# Altium PCB DQLA-Q.PcbDoc (part 1 of 2)
Units mil, origin at the board's own origin, x right, y up, seen from the top; angles counter-clockwise.
Board outline 12390.02 x 2400.02 mil, 6 copper layers (Top Layer, Plane 1, Signal 1, Signal 2, Plane 2, Bottom Layer), stack 32.112 mil thick; 112 components, 227 nets, 639 pads, 315 vias.
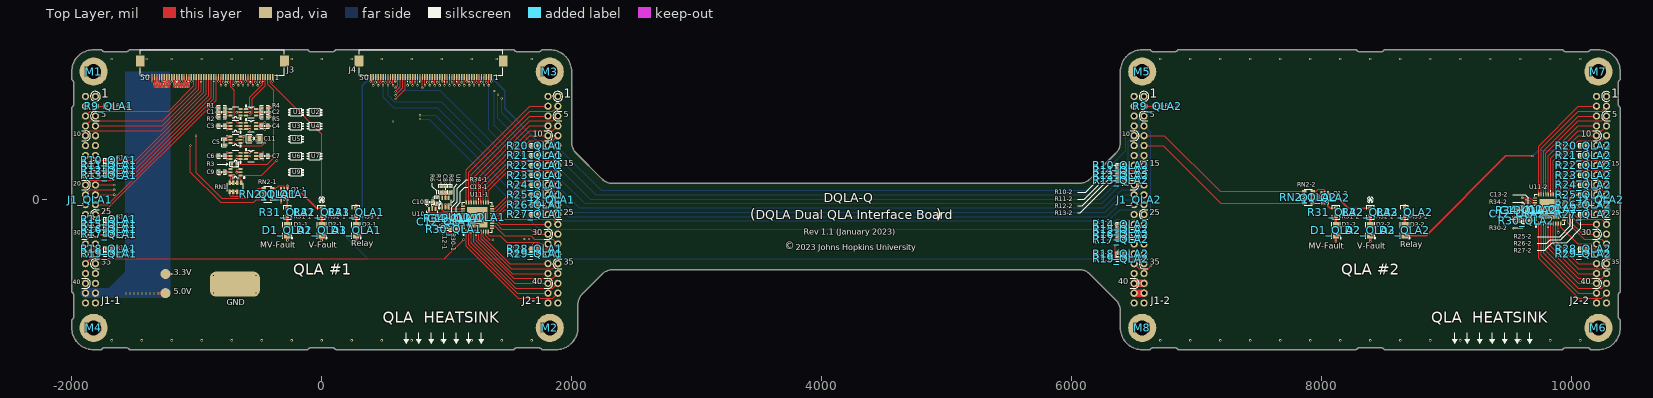
[diagram p0: Top Layer view]
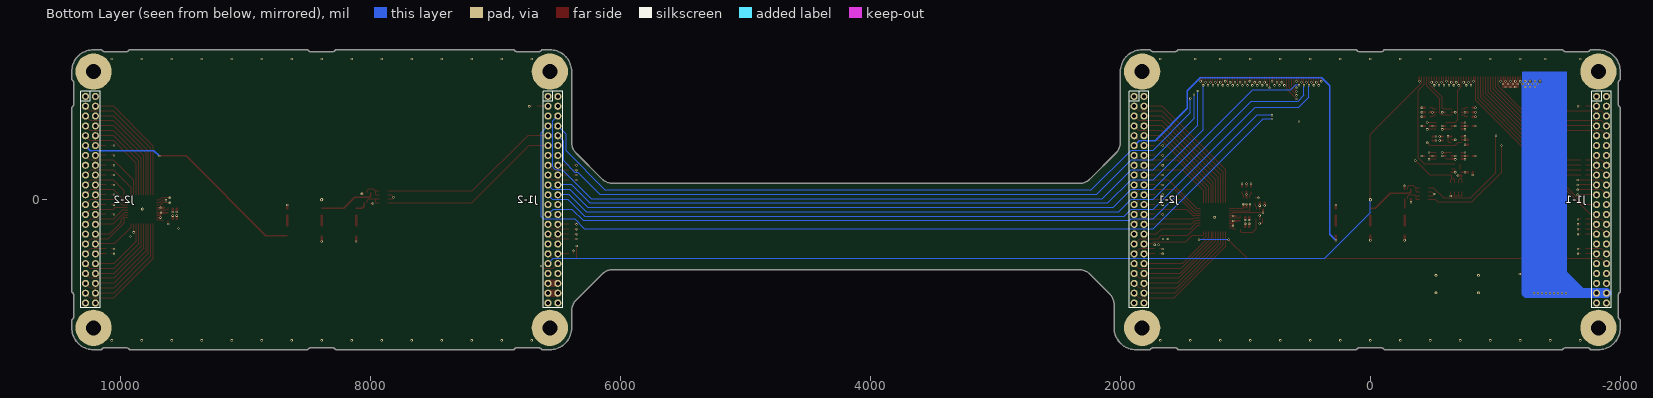
[diagram p1: Bottom Layer view, seen from below]
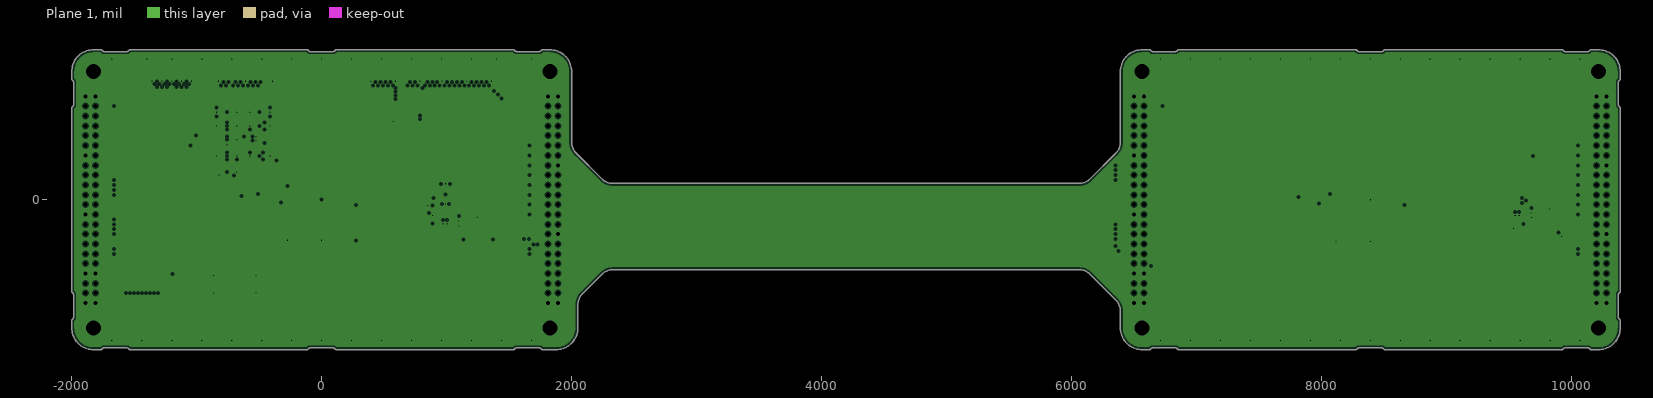
[diagram p2: Plane 1, clearances drawn from the general rule]
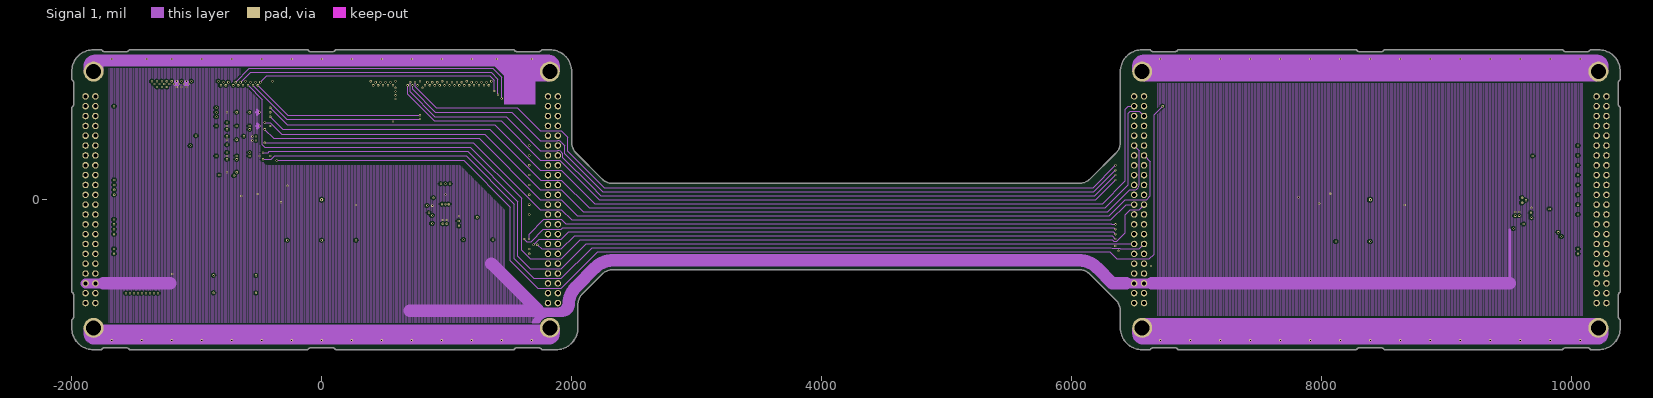
[diagram p3: Signal 1]
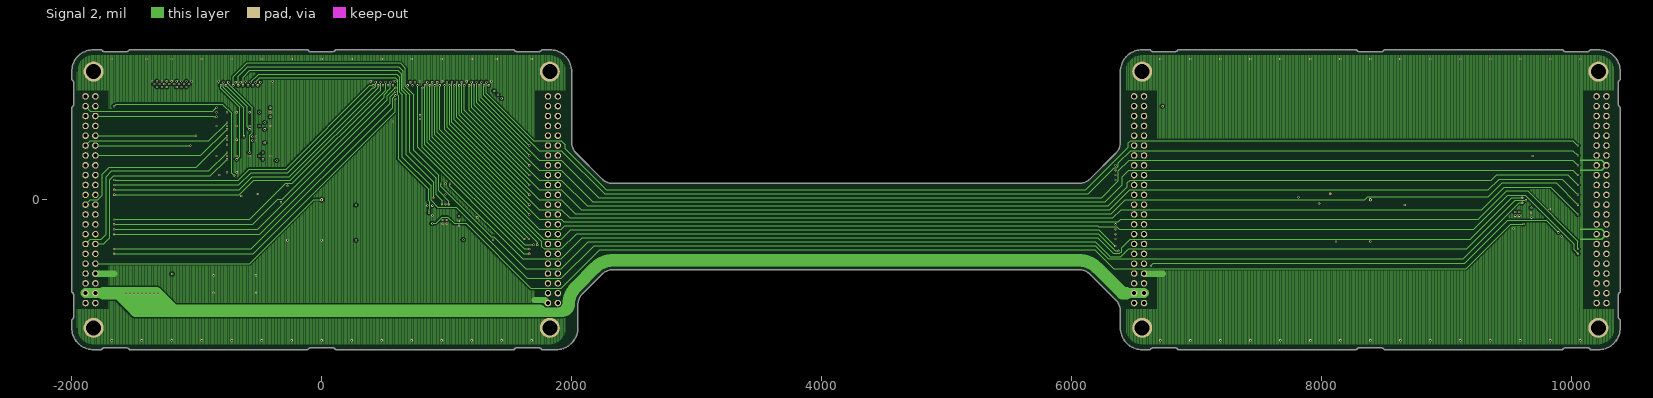
[diagram p4: Signal 2]
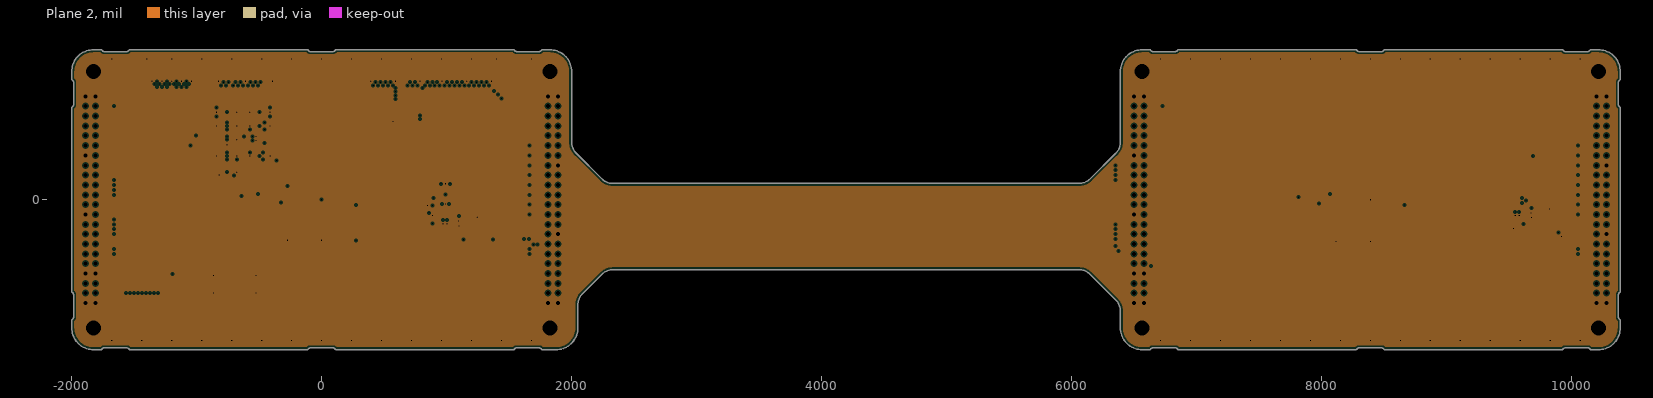
[diagram p5: Plane 2, clearances drawn from the general rule]
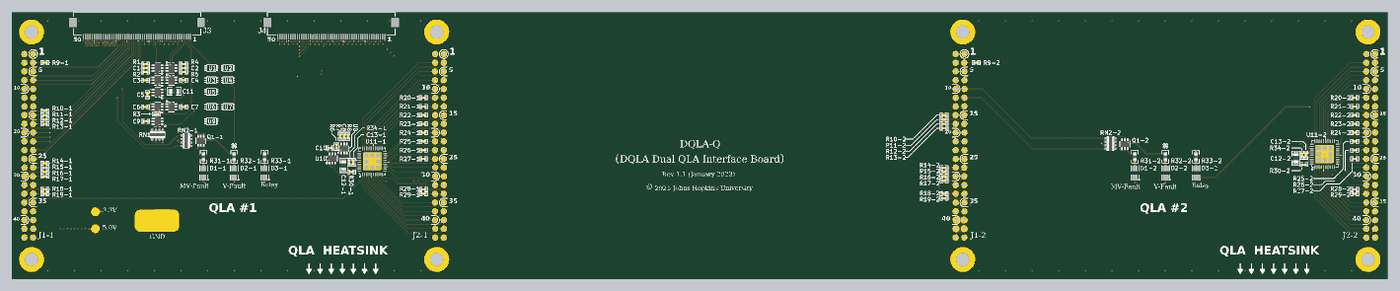
[diagram p7: 3D render of the assembled board from above, using the file's embedded part models]

## Layer stack, top to bottom
Top Solder: solder mask 0.4, Solder Resist, Dk 3.5
Top Layer: signal copper 1.4
Dielectric 2: prepreg 2.8, PP-006, Dk 4.1
Plane 1: plane copper 1.378, net GND
Dielectric 4: core 2.8, PP-006, Dk 4.1
Signal 1: signal copper 1.378
Dielectric 1: dielectric 12.6, FR-4, Dk 4.8
Signal 2: signal copper 1.378
Dielectric 5: core 2.8, PP-006, Dk 4.1
Plane 2: plane copper 1.378, net GND
Dielectric 3: prepreg 2.8, PP-006, Dk 4.1
Bottom Layer: signal copper 1.4
Bottom Solder: solder mask 0.4, Solder Resist, Dk 3.5

## Board outline
-1825,-1200 -1760.91,-1200 cw(c-1738,-1210) -1738,-1185 -1562,-1185 cw(c-1562,-1210) -1539.08,-1200 -1539.1,-1200.01 -110.92,-1200 cw(c-88.01,-1210) -88,-1185 88,-1185 cw(c88,-1210) 110.91,-1200 1539.08,-1199.99 cw(c1561.99,-1210) 1562,-1185 1738,-1185 cw(c1738,-1210) 1760.91,-1200 1875,-1200 ccw(c1875,-1025) 2050,-1025 2050,-840 cw(c2175,-840) 2086.61,-751.61 2241.61,-596.61 cw(c2330,-685) 2330,-560 6060,-560 cw(c6060,-685) 6148.39,-596.61 6353.39,-801.61 cw(c6265,-890) 6390,-890 6390,-1025 ccw(c6565,-1025) 6565,-1200 6629.09,-1200 cw(c6652,-1210) 6652,-1185 6828,-1185 cw(c6828,-1210) 6850.92,-1200 6850.9,-1200.01 8279.08,-1200 cw(c8301.99,-1210) 8302,-1185 8478,-1185 cw(c8478,-1210) 8500.91,-1200 9929.08,-1199.99 cw(c9951.99,-1210) 9952,-1185 10128,-1185 cw(c10128,-1210) 10150.91,-1200 10215,-1200 ccw(c10215,-1025) 10390,-1025 10390,-960.91 cw(c10400,-938) 10375,-938 10375,-762 cw(c10400,-762) 10390,-739.09 10390.01,739.09 10390,739.08 cw(c10400,761.99) 10375,761.99 10375,937.99 cw(c10400,937.99) 10390,960.91 10390,1024.99 ccw(c10215,1025) 10215,1200 10150.91,1200 cw(c10128,1210) 10128,1185 9952,1185 cw(c9952,1210) 9929.08,1200 8500.91,1200 cw(c8478,1210) 8478,1185 8302,1185 cw(c8302,1210) 8279.08,1200 6850.9,1200.01 6850.92,1200 cw(c6828,1210) 6828,1185 6652,1185 cw(c6652,1210) 6629.09,1200 6565,1200 ccw(c6565,1025) 6390,1025 6390,460 cw(c6265,460) 6353.39,371.61 6148.39,166.61 cw(c6060,255) 6060,130 2330,130 cw(c2330,255) 2241.61,166.61 2036.61,371.61 cw(c2125,460) 2000,460 2000,1025 ccw(c1825,1025) 1825,1200 1760.91,1200 cw(c1738,1210) 1738,1185 1562,1185 cw(c1562,1210) 1539.08,1200 110.91,1200 cw(c88,1210) 88,1185 -88,1185 cw(c-88,1210) -110.92,1200 -1539.1,1200.01 -1539.08,1200 cw(c-1562,1210) -1562,1185 -1738,1185 cw(c-1738,1210) -1760.91,1200 -1825,1200 ccw(c-1825,1025) -2000,1025 -2000,960.91 cw(c-2010,938) -1985,938 -1985,762 cw(c-2010,762) -2000,739.08 -2000.01,739.1 -2000,-739.08 cw(c-2010,-762) -1985,-762 -1985,-938 cw(c-2010,-938) -2000,-960.91 -2000,-1025 ccw(c-1825,-1025)

## Design rules (kind name [scope] priority, off if disabled: settings)
Clearance ClearancePoly [InPoly] p1: gap=9 ignorepadtopadclearanceinfootprint=FALSE
Clearance [All] p2: gap=6 ignorepadtopadclearanceinfootprint=FALSE
ComponentClearance [All] p1 off: gap=10 collisioncheckmode=3 verticalgap=10 showdistances=FALSE
HoleSize [All] p1: absolutevalues=TRUE maxlimit=250 minlimit=8 maxpercent=80.000 minpercent=20.000
MinimumSolderMaskSliver [All] p1: minsoldermaskwidth=4
PlaneClearance [All] p1: clearance=12
PlaneConnect PlaneConnectRelief [(AsMils(Hole)>20)And(AsMils(Hole)<60)] p1: planeconnectstyle=Relief reliefexpansion=20 reliefentries=4 reliefconductorwidth=10 reliefairgap=10
PlaneConnect [All] p2: planeconnectstyle=Direct reliefexpansion=20 reliefentries=4 reliefconductorwidth=10 reliefairgap=10
PolygonConnect [All] p1: connectstyle=Direct reliefconductorwidth=10 reliefentries=4 polygonreliefangle="90 Angle" airgapwidth=10
RoutingVias [All] p1: holewidth=8 width=18 viastyle="Through Hole" minholewidth=8 minwidth=18 maxholewidth=8 maxwidth=18
SilkToSilkClearance [All] p1: silktosilkclearance=3
SilkToSolderMaskClearance [IsPad] p1: minsilkscreentomaskgap=2 clearancetoexposedcopper=TRUE
SolderMaskExpansion [All] p1: expansion=4 istentingtop=FALSE
Width [All] p1: maxlimit=100 minlimit=6 preferedwidth=8
23 further rules are at their usual default settings.

## Classes and differential pairs
channel class S03: QLA1 QLA2

## Components (designator, comment, footprint, x,y, rotation, side; value= is the part's Value field where it differs from the comment)
C1 "0.1uF" C0402 -800,700 r180 top
C2 "0.1uF" C0402 -455,700 r0 top
C3 "0.1uF" C0402 -800,590 r180 top
C4 "0.1uF" C0402 -455,590 r0 top
C5 "0.1uF" C0402 -781,460 r270 top
C6 "0.1uF" C0402 -800,350 r180 top
C7 "0.1uF" C0402 -455,350 r0 top
C8 "0.1uF" C0402 990,85 r90 top
C9 "0.1uF" C0402 -800,220 r180 top
C10 "0.1uF" C0402 865,-20 r180 top
C11 "22uF" C0805 -540,490 r0 top
C12_QLA1 "22uF" C0805 985.5,-177.5 r270 top (schematic designator C12)
C12_QLA2 "22uF" C0805 9565.5,-112.5 r270 top (schematic designator C12)
C13_QLA1 "0.1uF" C0402 1074.58,-149.84 r270 top (schematic designator C13)
C13_QLA2 "0.1uF" C0402 9654.58,-84.84 r270 top (schematic designator C13)
D1_QLA1 "LED" LED-0805 -275,-245 r90 top (schematic designator D1)
D1_QLA2 "LED" LED-0805 8115,-245 r90 top (schematic designator D1)
D2_QLA1 "LED" LED-0805 0,-245 r90 top (schematic designator D2)
D2_QLA2 "LED" LED-0805 8390,-245 r90 top (schematic designator D2)
D3_QLA1 "LED" LED-0805 275,-245 r90 top (schematic designator D3)
D3_QLA2 "LED" LED-0805 8665,-245 r90 top (schematic designator D3)
J1_QLA1 "HEADER 22x2-1" HDR-22x2-2MM -1850,0 r270 top (schematic designator J1)
J1_QLA2 "HEADER 22x2-1" HDR-22x2-2MM 6540,0 r270 top (schematic designator J1)
J2_QLA1 "HEADER 22x2-1" HDR-22x2-2MM 1850,0 r270 top (schematic designator J2)
J2_QLA2 "HEADER 22x2-1" HDR-22x2-2MM 10240,0 r270 top (schematic designator J2)
J3 "FPC 50" CONN-XF3M1-5015-1B -875,1155 r180 top
J4 "FPC 50" CONN-XF3M1-5015-1B 875,1155 r180 top locked
M1 "MHOLE" MHOLE4 -1825,1025 r0 top
M2 "MHOLE" MHOLE4 1825,-1025 r0 top
M3 "MHOLE" MHOLE4 1825,1025 r0 top
M4 "MHOLE" MHOLE4 -1825,-1025 r0 top
M5 "MHOLE" MHOLE4 6565,1025 r0 top
M6 "MHOLE" MHOLE4 10215,-1025 r0 top
M7 "MHOLE" MHOLE4 10215,1025 r0 top
M8 "MHOLE" MHOLE4 6565,-1025 r0 top
Q1_QLA1 "MMDT3906" SC70-6-NP -300,45 r180 top (schematic designator Q1)
Q1_QLA2 "MMDT3906" SC70-6-NP 8025,15 r180 top (schematic designator Q1)
R1 "49.9" R0402 -800,736 r180 top
R2 "49.9" R0402 -800,664 r180 top
R3 "49.9" R0402 -700,285 r0 top
R4 "49.9" R0402 -455,736 r0 top
R5 "49.9" R0402 -455,664 r0 top
R6 "49.9" R0402 921,-5 r90 top
R7 "49.9" R0402 954,85 r90 top
R8 "49.9" R0402 1026,85 r90 top
R9_QLA1 "49.9" R0402 -1705,748.03 r0 top (schematic designator R9)
R9_QLA2 "49.9" R0402 6685,748.03 r0 top (schematic designator R9)
R10_QLA1 "49.9" R0402 -1705,314.96 r0 top (schematic designator R10)
R10_QLA2 "49.9" R0402 6395,275.59 r180 top (schematic designator R10)
R11_QLA1 "49.9" R0402 -1705,275.59 r0 top (schematic designator R11)
R11_QLA2 "49.9" R0402 6395,236.22 r180 top (schematic designator R11)
R12_QLA1 "49.9" R0402 -1705,236.22 r0 top (schematic designator R12)
R12_QLA2 "49.9" R0402 6395,196.85 r180 top (schematic designator R12)
R13_QLA1 "49.9" R0402 -1705,196.85 r0 top (schematic designator R13)
R13_QLA2 "49.9" R0402 6395,157.48 r180 top (schematic designator R13)
R14_QLA1 "49.9" R0402 -1705,-157.48 r0 top (schematic designator R14)
R14_QLA2 "49.9" R0402 6395,-196.85 r180 top (schematic designator R14)
R15_QLA1 "49.9" R0402 -1705,-196.85 r0 top (schematic designator R15)
R15_QLA2 "49.9" R0402 6395,-236.22 r180 top (schematic designator R15)
R16_QLA1 "49.9" R0402 -1705,-236.22 r0 top (schematic designator R16)
R16_QLA2 "49.9" R0402 6395,-275.59 r180 top (schematic designator R16)
R17_QLA1 "49.9" R0402 -1705,-275.59 r0 top (schematic designator R17)
R17_QLA2 "49.9" R0402 6395,-314.96 r180 top (schematic designator R17)
R18_QLA1 "49.9" R0402 -1705,-393.7 r0 top (schematic designator R18)
R18_QLA2 "49.9" R0402 6395,-433.07 r180 top (schematic designator R18)
R19_QLA1 "49.9" R0402 -1705,-433.07 r0 top (schematic designator R19)
R19_QLA2 "49.9" R0402 6395,-472.44 r180 top (schematic designator R19)
R20_QLA1 "49.9" R0402 1705,433.07 r180 top (schematic designator R20)
R20_QLA2 "49.9" R0402 10095,433.07 r180 top (schematic designator R20)
R21_QLA1 "49.9" R0402 1705,354.33 r180 top (schematic designator R21)
R21_QLA2 "49.9" R0402 10095,354.33 r180 top (schematic designator R21)
R22_QLA1 "49.9" R0402 1705,275.59 r180 top (schematic designator R22)
R22_QLA2 "49.9" R0402 10095,275.59 r180 top (schematic designator R22)
R23_QLA1 "49.9" R0402 1705,196.85 r180 top (schematic designator R23)
R23_QLA2 "49.9" R0402 10095,196.85 r180 top (schematic designator R23)
R24_QLA1 "49.9" R0402 1705,118.11 r180 top (schematic designator R24)
R24_QLA2 "49.9" R0402 10095,118.11 r180 top (schematic designator R24)
R25_QLA1 "49.9" R0402 1705,39.37 r180 top (schematic designator R25)
R25_QLA2 "49.9" R0402 10095,39.37 r180 top (schematic designator R25)
R26_QLA1 "49.9" R0402 1705,-39.37 r180 top (schematic designator R26)
R26_QLA2 "49.9" R0402 10095,-39.37 r180 top (schematic designator R26)
R27_QLA1 "49.9" R0402 1705,-118.11 r180 top (schematic designator R27)
R27_QLA2 "49.9" R0402 10095,-118.11 r180 top (schematic designator R27)
R28_QLA1 "49.9" R0402 1705,-393.7 r180 top (schematic designator R28)
R28_QLA2 "49.9" R0402 10095,-393.7 r180 top (schematic designator R28)
R29_QLA1 "49.9" R0402 1705,-433.07 r180 top (schematic designator R29)
R29_QLA2 "49.9" R0402 10095,-433.07 r180 top (schematic designator R29)
R30_QLA1 "49.9" R0402 1057.5,-235 r0 top (schematic designator R30)
R30_QLA2 "49.9" R0402 9637.5,-170 r0 top (schematic designator R30)
R31_QLA1 "150" R0603 -275,-100 r90 top (schematic designator R31)
R31_QLA2 "150" R0603 8115,-100 r90 top (schematic designator R31)
R32_QLA1 "150" R0603 0,-100 r90 top (schematic designator R32)
R32_QLA2 "150" R0603 8390,-100 r90 top (schematic designator R32)
R33_QLA1 "150" R0603 275,-100 r90 top (schematic designator R33)
R33_QLA2 "150" R0603 8665,-100 r90 top (schematic designator R33)
R34_QLA1 "39.0K" R0402 1038.58,-149.84 r270 top (schematic designator R34)
R34_QLA2 "39.0K" R0402 9618.58,-84.84 r270 top (schematic designator R34)
RN1 "10K" RN-742C083 -690,100 r180 top
RN2_QLA1 "10K" RN-742C083 -430,45 r270 top (schematic designator RN2)
RN2_QLA2 "10K" RN-742C083 7895,20 r270 top (schematic designator RN2)
U1 "74LVC2G17" SC70-6 -690,700 r90 top
U2 "74LVC2G17" SC70-6 -565,700 r270 top
U3 "74LVC2G17" SC70-6 -690,590 r90 top
U4 "74LVC2G17" SC70-6 -565,590 r270 top
U5 "74LVC2G17" SC70-6 -690,480 r90 top
U6 "74LVC2G17" SC70-6 -690,350 r90 top
U7 "74LVC2G17" SC70-6 -565,350 r270 top
U8 "74LVC2G17" SC70-6 990,-25 r0 top
U9 "74LVC1G157" SC70-6 -690,220 r90 top
U10 "74LVC1G157" SC70-6 885,-115 r0 top
U11_QLA1 "MAX7301-QFN" QFN-40-6mm 1245,-140 r90 top (schematic designator U11)
U11_QLA2 "MAX7301-QFN" QFN-40-6mm 9825,-75 r90 top (schematic designator U11)

## Footprints (in the part's own frame and the unit in brackets; to place one, negate y for a bottom-side part, rotate by r counter-clockwise, add the part's x,y. Pads: shape width x height; smd on the part's side, far side on the other; paste and mask are expansions set on the pad)
C0402 [mil]
  rrect15% 20x22 smd mask+2: 1(-20,0) 2(20,0)
  silkscreen extent -37,-18 37,18, body extent -20,-10 20,10, height 20
C0805 [mil]
  rrect15% 30x50 smd mask+2: 1(-40,0) 2(40,0)
  silkscreen extent -65,-35 65,35, body extent -40,-25 40,25, height 40
CONN-XF3M1-5015-1B [mil] "Omron: CONN-XF3M(1)-5015-1B"
  rrect15% 11x50 smd mask+0.5: 1(-482.28,172.5) 2(-462.6,172.5) 3(-442.91,172.5) 4(-423.23,172.5) 5(-403.54,172.5) 6(-383.86,172.5) 7(-364.17,172.5) 8(-344.49,172.5) 9(-324.8,172.5) 10(-305.12,172.5) 11(-285.43,172.5) 12(-265.75,172.5) 13(-246.06,172.5) 14(-226.38,172.5) 15(-206.69,172.5) 16(-187.01,172.5) 17(-167.32,172.5) 18(-147.64,172.5) 19(-127.95,172.5) 20(-108.27,172.5) 21(-88.58,172.5) 22(-68.9,172.5) 23(-49.21,172.5) 24(-29.53,172.5) 25(-9.84,172.5) 26(9.84,172.5) 27(29.53,172.5) 28(49.21,172.5) 29(68.9,172.5) 30(88.58,172.5) 31(108.27,172.5) 32(127.95,172.5) 33(147.64,172.5) 34(167.32,172.5) 35(187.01,172.5) 36(206.69,172.5) 37(226.38,172.5) 38(246.06,172.5) 39(265.75,172.5) 40(285.43,172.5) 41(305.12,172.5) 42(324.8,172.5) 43(344.49,172.5) 44(364.17,172.5) 45(383.86,172.5) 46(403.54,172.5) 47(423.23,172.5) 48(442.91,172.5) 49(462.6,172.5) 50(482.28,172.5)
  rrect5% 70x85 smd: 51(-576.86,45) 52(576.86,45)
  silkscreen extent -575,-45 575,217
HDR-22x2-2MM [mil]
  round 58 / inner round 52 / far side round 57 hole 32: 1(-826.77,39.37) 2(-826.77,-39.37) 3(-748.03,39.37) 4(-748.03,-39.37) 5(-669.29,39.37) 6(-669.29,-39.37) 7(-590.55,39.37) 8(-590.55,-39.37) 9(-511.81,39.37) 10(-511.81,-39.37) 11(-433.07,39.37) 12(-433.07,-39.37) 13(-354.33,39.37) 14(-354.33,-39.37) 15(-275.59,39.37) 16(-275.59,-39.37) 17(-196.85,39.37) 18(-196.85,-39.37) 19(-118.11,39.37) 20(-118.11,-39.37) 21(-39.37,39.37) 22(-39.37,-39.37) 23(39.37,39.37) 24(39.37,-39.37) 25(118.11,39.37) 26(118.11,-39.37) 27(196.85,39.37) 28(196.85,-39.37) 29(275.59,39.37) 30(275.59,-39.37) 31(354.33,39.37) 32(354.33,-39.37) 33(433.07,39.37) 34(433.07,-39.37) 35(511.81,39.37) 36(511.81,-39.37) 37(590.55,39.37) 38(590.55,-39.37) 39(669.29,39.37) 40(669.29,-39.37) 41(748.03,39.37) 42(748.03,-39.37) 43(826.77,39.37) 44(826.77,-39.37)
  silkscreen extent -866,-70 709,79
LED-0805 [mil]
  rect 50x50 smd mask+2: 1(-42,0) 2(42,0)
  silkscreen extent -67,-43 66,35
MHOLE4 [mil]
  round 225 / inner round 160 / far side round 290 hole 120: 1(0,0)
QFN-40-6mm [mil]
  rrect20% 32x11 smd mask+2: 1(-116,88.58) 2(-116,68.9) 3(-116,49.21) 4(-116,29.53) 5(-116,9.84) 6(-116,-9.84) 7(-116,-29.53) 8(-116,-49.21) 9(-116,-68.9) 10(-116,-88.58) 21(116,-88.58) 22(116,-68.9) 23(116,-49.21) 24(116,-29.53) 25(116,-9.84) 26(116,9.84) 27(116,29.53) 28(116,49.21) 29(116,68.9) 30(116,88.58)
  rrect20% 11x32 smd mask+2: 11(-88.58,-116) 12(-68.9,-116) 13(-49.21,-116) 14(-29.53,-116) 15(-9.84,-116) 16(9.84,-116) 17(29.53,-116) 18(49.21,-116) 19(68.9,-116) 20(88.58,-116) 31(88.58,116) 32(68.9,116) 33(49.21,116) 34(29.53,116) 35(9.84,116) 36(-9.84,116) 37(-29.53,116) 38(-49.21,116) 39(-68.9,116) 40(-88.58,116)
  rrect2% 162.5x162.5 smd paste-85 mask+2: 41(0,0)
  silkscreen extent -150,-150 150,150
R0402 [mil]
  rrect15% 20x22 smd mask+2: 1(-20,0) 2(20,0)
  silkscreen extent -37,-18 37,18, body extent -20,-10 20,10, height 20
R0603 [mil]
  rrect10% 30x30 smd mask+2: 1(-30,0) 2(30,0)
  silkscreen extent -55,-30 55,30, body extent -30,-15 30,15, height 25
RN-742C083 [mil]
  rrect10% 20x36 smd mask+1: 1(-47.24,-35.5) 2(-15.75,-35.5) 3(15.75,-35.5) 4(47.24,-35.5) 5(47.24,35.5) 6(15.75,35.5) 7(-15.75,35.5) 8(-47.24,35.5)
  silkscreen extent -64,-32 64,32, body extent -67,-35 67,36, height 28
SC70-6 [mil] "SC70-6, SOT-363"
  rrect20% 15x32 smd mask+2: 1(-25.59,-39) 2(0,-39) 3(25.59,-39) 4(25.59,39) 5(0,39) 6(-25.59,39)
  silkscreen extent -57,-47 45,25, body extent -42,-47 42,47, height 43
SC70-6-NP [mil] "SC70-6, SOT-363"
  rrect20% 15x32 smd mask+2: 1(-25.59,-39) 2(0,-39) 3(25.59,-39) 4(25.59,39) 5(0,39) 6(-25.59,39)
  silkscreen extent -45,-25 45,25, body extent -42,-47 42,47, height 43

## Part data
C1 C2 C3 C4 C5 C6 C7 C8: library part CAP
C9 C10 C11 C12_QLA1 C12_QLA2 C13_QLA1 C13_QLA2: library part CAP-GND
D1_QLA1 D1_QLA2 D2_QLA1 D2_QLA2: Color=GREEN, Angle="130 Deg", P/N=LTST-C170
D3_QLA1 D3_QLA2: Color=RED, Angle="130 Deg", P/N=LTST-C170
M1 M2 M3 M4 M5 M6 M7 M8: "Mounting Hole"
Q1_QLA1 Q1_QLA2: library part PNP-DUAL-DIAG
R1 R2 R3 R4 R5 R6 R7 R8 R9_QLA1 R9_QLA2 R10_QLA1 R10_QLA2 R11_QLA1 R11_QLA2 R12_QLA1 R12_QLA2 R13_QLA1 R13_QLA2 R14_QLA1 R14_QLA2 R15_QLA1 R15_QLA2 R16_QLA1 R16_QLA2 R17_QLA1 R17_QLA2 R18_QLA1 R18_QLA2 R19_QLA1 R19_QLA2 R20_QLA1 R20_QLA2 R21_QLA1 R21_QLA2 R22_QLA1 R22_QLA2 R23_QLA1 R23_QLA2 R24_QLA1 R24_QLA2 R25_QLA1 R25_QLA2 R26_QLA1 R26_QLA2 R27_QLA1 R27_QLA2 R28_QLA1 R28_QLA2 R29_QLA1 R29_QLA2 R30_QLA1 R30_QLA2 R31_QLA1 R31_QLA2 R32_QLA1 R32_QLA2 R33_QLA1 R33_QLA2 R34_QLA1 R34_QLA2: library part R
RN1 RN2_QLA1 RN2_QLA2: library part RN-DISC-SM-4X
U1 U2 U3 U4 U5 U6 U7 U8: library part 2G17-2, "NC7WZ17"
U9 U10: library part 1G157

## Free pads (board coordinates)
  round 18 / inner round 18 / far side round 22 hole 8 mask+4: 1(-865,-745) 1(-865,-605) 1(-525,-745) 1(-525,-605) 1(1245,-140) 1(9825,-75)
  round 25 hole 8 mask+4: 1(0,0) 1(8390,0)
  round 80 smd paste-50: 2(-1250,-748.03) 2(-1250,-595)
  rrect50% 400x200 smd paste-250: 2(-695,-675)

## Via types
v1: diameter 18, hole 8, Top Layer to Bottom Layer, tented both sides, 315 vias

## Nets (pads, with @x,y where several pads share a name; then routed paths per layer and width w, separated by ;. In a path a pad name is that pad's centre, name@x,y a point inside that pad or via, vN(x,y) a via of type N, cw(c..) or ccw(c..) an arc to the next point about the centre after c; other vN are vias at no path point)
/DAC_QLA1: J1_QLA1.25 J3.24 | length 1531.2
  Top Layer w8: J1_QLA1.25@-1810.63,-118.11 -1758.01,-118.11 -845.47,794.42 J3.24@-845.47,982.5
/DAC_QLA2: J1_QLA2.25 J3.7 | length 7661.2
  Top Layer w8: v1(-510.83,915) J3.7@-510.83,982.5
  Signal 1 w8: v1(-510.83,915) -270.83,675 v1(786.42,675)
  Bottom Layer w8: v1(786.42,675) 907.52,675 1740,-157.48 1917.56,-157.48 1930.08,-170 6295,-170 6386.26,-78.74 6540,-78.74 J1_QLA2.25@6579.37,-118.11
/EEPROM_QLA1: J1_QLA1.6 J3.33 | length 1038.9
  Top Layer w8: J1_QLA1.6@-1889.37,669.29 -1850,708.66 -1223.98,708.66 -1022.64,910 J3.33@-1022.64,982.5
/EEPROM_QLA2: J1_QLA2.6 J3.6 | length 8240.8
  Top Layer w8: v1(-491.14,940) J3.6@-491.14,982.5
  Signal 1 w8: v1(-491.14,940) -441.14,990 1345,990 1380,955 v1(1380,870)
  Bottom Layer w8: v1(1380,870) 1380,596.22 1740,236.22 1917.56,236.22 2148.78,5 6230,5 6461.22,236.22 6500.63,236.22 ccw(c6500.63,275.59) 6540,275.59 6540,629.92 J1_QLA2.6@6500.63,669.29
/EXP-CS_QLA1: J3.8 U10.6 U11_QLA1.34 | length 2673.5
  Top Layer w8: v1(-530.51,940) J3.8@-530.51,982.5 ; v1(859.41,-104.5) 859.91,-105 1100,-105 1105.47,-110.47 U11_QLA1.34@1129,-110.47
  Top Layer w15: v1(859.41,-104.5) U10.6@859.41,-76
  Signal 2 w8: v1(-530.51,940) -495.51,975 589.57,975 608.57,956 608.57,841.43 615,835 615,325 855,85 855,-10 865,-20 865,-70 859.41,-75.59 v1(859.41,-104.5)
/EXP-CS_QLA2: J3.10 U11_QLA2.34 | length 11801
  Top Layer w8: v1(-569.88,940) J3.10@-569.88,982.5 ; v1(9605,-25) 9660,-25 9680.47,-45.47 U11_QLA2.34@9709,-45.47
  Signal 2 w8: v1(-569.88,940) -504.88,1005 598.94,1005 623.67,980.27 623.67,861.33 645,840 645,340 875,110 875,-5 930,-60 1075,-60 1644.92,-629.92 1917.56,-629.92 2179.48,-368 6188,-368 6292.44,-472.44 9132.56,-472.44 9580,-25 v1(9605,-25)
/FAULT1_QLA1: J2_QLA1.35 U11_QLA1.7 | length 785.1
  Top Layer w6: U11_QLA1.7@1274.53,-256 1274.53,-310 1515.71,-551.18 1610,-551.18 1850,-551.18 J2_QLA1.35@1889.37,-511.81
/FAULT1_QLA2: J2_QLA2.35 U11_QLA2.7 | length 683.9
  Top Layer w6: U11_QLA2.7@9854.53,-191 9854.53,-350.71 10055,-551.18 10240,-551.18 J2_QLA2.35@10279.37,-511.81
/FAULT2_QLA1: J2_QLA1.37 U11_QLA1.5 | length 868.8
  Top Layer w6: U11_QLA1.5@1235.16,-256 1235.16,-330 1535.08,-629.92 1610,-629.92 1850,-629.92 J2_QLA1.37@1889.37,-590.55
/FAULT2_QLA2: J2_QLA2.37 U11_QLA2.5 | length 778.9
  Top Layer w6: U11_QLA2.5@9815.16,-191 9815.16,-390.08 10055,-629.92 10240,-629.92 J2_QLA2.37@10279.37,-590.55
/FAULT3_QLA1: J2_QLA1.39 U11_QLA1.3 | length 952.5
  Top Layer w6: U11_QLA1.3@1195.79,-256 1195.79,-350 1554.45,-708.66 1610,-708.66 1850,-708.66 J2_QLA1.39@1889.37,-669.29
/FAULT3_QLA2: J2_QLA2.39 U11_QLA2.3 | length 874
  Top Layer w6: U11_QLA2.3@9775.79,-191 9775.79,-429.45 10055,-708.66 10240,-708.66 J2_QLA2.39@10279.37,-669.29
/FAULT4_QLA1: J2_QLA1.41 U11_QLA1.1 | length 1037
  Top Layer w6: U11_QLA1.1@1156.42,-256 1156.42,-371.42 1572.4,-787.4 1850,-787.4 J2_QLA1.41@1889.37,-748.03
/FAULT4_QLA2: J2_QLA2.41 U11_QLA2.1 | length 967.6
  Top Layer w6: U11_QLA2.1@9736.42,-191 9736.42,-466.42 10057.4,-787.4 10240,-787.4 J2_QLA2.41@10279.37,-748.03
/IOEXP_QLA1: J1_QLA1.10 J3.30 | length 1185.8
  Top Layer w8: J1_QLA1.10@-1889.37,511.81 -1850,551.18 -1283.88,551.18 -1250.03,585.03 -973.85,861.21 -963.58,871.47 J3.30@-963.58,982.5
/IOEXP_QLA2: J1_QLA2.10 J3.14 | length 8102.3
  Top Layer w8: v1(-648.62,940) J3.14@-648.62,982.5
  Signal 1 w8: v1(-648.62,940) -568.62,1020 1355,1020 1410,965 v1(1410,840)
  Bottom Layer w8: v1(1410,840) 1410,650 1745.04,314.96 1917.56,314.96 2192.52,40 6160,40 6336.53,216.53 6361.53,216.53 6455,310 6455,466.18 J1_QLA2.10@6500.63,511.81
/MV-FLT_QLA1: J1_QLA1.9 RN2_QLA1.1 | length 1760.9
  Top Layer w8: v1(-1005,511.81) -1005,215 -800,10 -590,10 -507.76,92.24 RN2_QLA1.1@-465.5,92.24
  Signal 2 w8: J1_QLA1.9@-1810.63,511.81 v1(-1005,511.81)
/MV-FLT_QLA2: J1_QLA2.9 RN2_QLA2.1 | length 1464.3
  Top Layer w8: J1_QLA2.9@6579.37,511.81 6743.19,511.81 7187.76,67.24 RN2_QLA2.1@7859.5,67.24
/RELAY_QLA1: D3_QLA1.1 J2_QLA1.11 | length 3190.6
  Top Layer w20: v1(275,-324.54) D3_QLA1.1@275,-287
  Bottom Layer w8: 1791.26,472.44 1830,472.44
  Bottom Layer w12: v1(275,-324.54) 325,-274.54 325,910 390,975 1360,975 1465,870 1465,730 1722.56,472.44 1791.26,472.44 ; 1830,472.44 1850,472.44 J2_QLA1.11@1889.37,433.07
/RELAY_QLA2: D3_QLA2.1 J2_QLA2.11 | length 1912.6
  Top Layer w12: D3_QLA2.1@8665,-287 8838,-287 9475,350 v1(9690,350)
  Bottom Layer w8: 10181.26,393.7 10220,393.7
  Bottom Layer w12: v1(9690,350) 9733.7,393.7 10181.26,393.7 ; 10220,393.7 10240,393.7 J2_QLA2.11@10279.37,433.07
/V-FAULT_QLA1: J1_QLA1.11 RN2_QLA1.4 | length 1666.8
  Top Layer w8: v1(-1050,433.07) -1050,220 -807.76,-22.24 -542.24,-22.24 -522.24,-2.24 RN2_QLA1.4@-465.5,-2.24
  Signal 2 w8: J1_QLA1.11@-1810.63,433.07 v1(-1050,433.07)
/V-FAULT_QLA2: J1_QLA2.11 RN2_QLA2.4 | length 1470.8
  Top Layer w8: J1_QLA2.11@6579.37,433.07 6731.93,433.07 7192.24,-27.24 RN2_QLA2.4@7859.5,-27.24
CONV-CUR: J3.22 U6.1 U7.3 | length 807.8
  Top Layer w8: v1(-806.1,915) J3.22@-806.1,982.5 ; U6.1@-651,324.41 U7.3@-604,324.41
  Top Layer w15: v1@-679.5,324.41 U6.1@-651,324.41
  Signal 2 w8: v1(-806.1,915) -806.1,891.1 -655,740 -655,347.41 v1(-679.5,322.91)
CONV-CUR_QLA1: J1_QLA1.31 U6.6 | length 1645.8
  Top Layer w15: v1@-757.5,324.41 -745.91,324.41 ; v1@-756.72,321.51 -745.91,324.41 ; -745.86,324.42 -745.91,324.41 ; U6.6@-729,324.41 -745.91,324.41
  Signal 2 w8: J1_QLA1.31@-1810.63,-354.33 -1744.33,-354.33 -1695,-305 -1695,160 -1665,190 -890.41,190 v1(-757.5,322.91)
CONV-CUR_QLA2: J1_QLA2.31 U7.4 | length 7907.3
  Top Layer w8: U7.4@-526,324.41 -524.5,322.91 v1(-470,322.91)
  Signal 1 w8: v1@-475,322.91 v1(-470,322.91) -403.59,322.91 -376.5,350 1155,350 1540,-35 1540,-473.66 1696.26,-629.92 1917.56,-629.92 2163.48,-384 6319,-384 6325,-390 6386,-390 6389.7,-393.7 6540,-393.7 J1_QLA2.31@6579.37,-354.33
CONV-POT: J3.20 U3.1 U4.3 | length 585.6
  Top Layer w8: v1(-766.73,915) J3.20@-766.73,982.5 ; U3.1@-651,564.41 U4.3@-604,564.41
  Top Layer w15: U4.3@-604,564.41 -587.09,564.41 ; -587.14,564.42 -587.09,564.41 ; v1@-576.28,561.51 -587.09,564.41 ; v1@-575.5,564.41 -587.09,564.41
  Signal 2 w8: v1(-766.73,915) -595,743.27 -595,582.41 v1(-575.5,562.91)
CONV-POT_QLA1: J1_QLA1.13 U3.6 | length 1179.3
  Top Layer w15: v1@-757.5,564.41 -745.91,564.41 ; v1@-756.72,561.51 -745.91,564.41 ; -745.86,564.42 -745.91,564.41 ; U3.6@-729,564.41 -745.91,564.41
  Signal 2 w8: J1_QLA1.13@-1810.63,354.33 -966.08,354.33 v1(-757.5,562.91)
CONV-POT_QLA2: J1_QLA2.13 U4.4 | length 7856.1
  Top Layer w8: U4.4@-526,564.41 -524.5,562.91 v1(-456,562.91)
  Signal 1 w8: v1@-458.5,562.91 -385.59,490 1258.74,490 1748.74,0 1917.56,0 2045.56,-128 6302,-128 6430,0 6600,0 6630,30 6630,303.7 J1_QLA2.13@6579.37,354.33
DIR12_QLA1: J1_QLA1.8 J3.32 | length 1098.8
  Top Layer w8: J1_QLA1.8@-1889.37,590.55 -1850,629.92 -1270.19,629.92 -1002.95,897.16 J3.32@-1002.95,982.5
DIR12_QLA2: J1_QLA2.8 J3.16 | length 8140.1
  Top Layer w8: v1(-687.99,940) J3.16@-687.99,982.5
  Signal 1 w8: v1(-687.99,940) -577.99,1050 1370,1050 1440,980 v1(1440,810)
  Bottom Layer w8: v1(1440,810) 1440,695 1741.3,393.7 1917.56,393.7 2236.26,75 6120,75 6435,390 6435,524.92 J1_QLA2.8@6500.63,590.55
DIR34_QLA1: J1_QLA1.7 J3.31 | length 1047.2
  Top Layer w8: J1_QLA1.7@-1810.63,590.55 -1277.03,590.55 -983.27,884.32 J3.31@-983.27,982.5
DIR34_QLA2: J1_QLA2.7 J3.9 | length 8520.8
  Top Layer w8: v1(-550.2,915) J3.9@-550.2,982.5
  Signal 1 w8: v1(-550.2,915) -280.2,645 v1(786.42,645)
  Bottom Layer w8: v1(786.42,645) 858.78,645 1740,-236.22 6283.78,-236.22 6362.52,-157.48 6613.78,-157.48 6635,-136.26 6635,534.92 J1_QLA2.7@6579.37,590.55
DISABLE1_QLA1: J2_QLA1.36 U11_QLA1.8 | length 648.2
  Top Layer w6: U11_QLA1.8@1294.21,-256 1294.21,-300 1506.02,-511.81 J2_QLA1.36@1810.63,-511.81
DISABLE1_QLA2: J2_QLA2.36 U11_QLA2.8 | length 541.3
  Top Layer w6: U11_QLA2.8@9874.21,-191 9874.21,-331.02 10055,-511.81 J2_QLA2.36@10200.63,-511.81
DISABLE2_QLA1: J2_QLA1.38 U11_QLA1.6 | length 731.9
  Top Layer w6: U11_QLA1.6@1254.84,-256 1254.84,-320 1525.39,-590.55 J2_QLA1.38@1810.63,-590.55
DISABLE2_QLA2: J2_QLA2.38 U11_QLA2.6 | length 636.4
  Top Layer w6: U11_QLA2.6@9834.84,-191 9834.84,-370.39 10055,-590.55 J2_QLA2.38@10200.63,-590.55
DISABLE3_QLA1: J2_QLA1.40 U11_QLA1.4 | length 815.6
  Top Layer w6: U11_QLA1.4@1215.47,-256 1215.47,-340 1544.76,-669.29 J2_QLA1.40@1810.63,-669.29
DISABLE3_QLA2: J2_QLA2.40 U11_QLA2.4 | length 731.4
  Top Layer w6: U11_QLA2.4@9795.47,-191 9795.47,-409.76 10055,-669.29 J2_QLA2.40@10200.63,-669.29
DISABLE4_QLA1: J2_QLA1.42 U11_QLA1.2 | length 899.3
  Top Layer w6: U11_QLA1.2@1176.1,-256 1176.1,-360 1564.13,-748.03 J2_QLA1.42@1810.63,-748.03
DISABLE4_QLA2: J2_QLA2.42 U11_QLA2.2 | length 826.5
  Top Layer w6: U11_QLA2.2@9756.1,-191 9756.1,-449.13 10055,-748.03 J2_QLA2.42@10200.63,-748.03
ENC-A1#_QLA1: J2_QLA1.26 R27_QLA1.1 | length 85.6
  Top Layer w8: R27_QLA1.1@1725,-118.11 J2_QLA1.26@1810.63,-118.11
ENC-A1#_QLA2: J2_QLA2.26 R27_QLA2.1 | length 85.6
  Top Layer w8: R27_QLA2.1@10115,-118.11 J2_QLA2.26@10200.63,-118.11
ENC-A1_QLA1: J4.20 R27_QLA1.2 | length 1405.4
  Top Layer w8: v1(983.27,915) J4.20@983.27,982.5 ; v1(1660.94,-118.11) R27_QLA1.2@1685,-118.11
  Signal 2 w8: v1(983.27,915) 983.27,559.57 v1(1660.94,-118.11)
ENC-A1_QLA2: J4.17 R27_QLA2.2 | length 9903.7
  Top Layer w8: v1(1042.32,940) J4.17@1042.32,982.5 ; v1(10050.94,-118.11) R27_QLA2.2@10075,-118.11
  Signal 2 w8: v1(1042.32,940) 1042.32,618.94 1740,-78.74 1917.56,-78.74 1982.82,-144 6331,-144 6396.26,-78.74 9281.26,-78.74 9460,100 9832.83,100 v1(10050.94,-118.11)
ENC-A2#_QLA1: J2_QLA1.24 R26_QLA1.1 | length 85.6
  Top Layer w8: R26_QLA1.1@1725,-39.37 J2_QLA1.24@1810.63,-39.37
ENC-A2#_QLA2: J2_QLA2.24 R26_QLA2.1 | length 85.6
  Top Layer w8: R26_QLA2.1@10115,-39.37 J2_QLA2.24@10200.63,-39.37
ENC-A2_QLA1: J4.18 R26_QLA1.2 | length 1310.3
  Top Layer w8: v1(1022.64,915) J4.18@1022.64,982.5 ; v1(1660.94,-39.37) R26_QLA1.2@1685,-39.37
  Signal 2 w8: v1(1022.64,915) 1022.64,598.94 v1(1660.94,-39.37)
ENC-A2_QLA2: J4.15 R26_QLA2.2 | length 9811.1
  Top Layer w8: v1(1081.69,940) J4.15@1081.69,982.5 ; v1(10050.94,-39.37) R26_QLA2.2@10075,-39.37
  Signal 2 w8: v1(1081.69,940) 1081.69,658.31 1740,0 1917.56,0 2029.56,-112 6318,-112 6430,0 8345,0 8370,25 9335,25 9445,135 9876.58,135 v1(10050.94,-39.37)
ENC-A3#_QLA1: J2_QLA1.22 R25_QLA1.1 | length 85.6
  Top Layer w8: R25_QLA1.1@1725,39.37 J2_QLA1.22@1810.63,39.37
ENC-A3#_QLA2: J2_QLA2.22 R25_QLA2.1 | length 85.6
  Top Layer w8: R25_QLA2.1@10115,39.37 J2_QLA2.22@10200.63,39.37
ENC-A3_QLA1: J4.16 R25_QLA1.2 | length 1215.3
  Top Layer w8: v1(1062.01,915) J4.16@1062.01,982.5 ; v1(1660.94,39.37) R25_QLA1.2@1685,39.37
  Signal 2 w8: v1(1062.01,915) 1062.01,638.31 v1(1660.94,39.37)
ENC-A3_QLA2: J4.13 R25_QLA2.2 | length 9714.4
  Top Layer w8: v1(1121.06,940) J4.13@1121.06,982.5 ; v1(10050.94,39.37) R25_QLA2.2@10075,39.37
  Signal 2 w8: v1(1121.06,940) 1121.06,697.68 1740,78.74 1917.56,78.74 2076.3,-80 6305,-80 6463.74,78.74 9333.74,78.74 9420,165 9925.32,165 v1(10050.94,39.37)
ENC-A4#_QLA1: J2_QLA1.20 R24_QLA1.1 | length 85.6
  Top Layer w8: R24_QLA1.1@1725,118.11 J2_QLA1.20@1810.63,118.11
ENC-A4#_QLA2: J2_QLA2.20 R24_QLA2.1 | length 85.6
  Top Layer w8: R24_QLA2.1@10115,118.11 J2_QLA2.20@10200.63,118.11
ENC-A4_QLA1: J4.14 R24_QLA1.2 | length 1120.2
  Top Layer w8: v1(1101.38,915) J4.14@1101.38,982.5 ; v1(1660.94,118.11) R24_QLA1.2@1685,118.11
  Signal 2 w8: v1(1101.38,915) 1101.38,677.68 v1(1660.94,118.11)
ENC-A4_QLA2: J4.10 R24_QLA2.2 | length 9631.3
  Top Layer w8: v1(1180.12,915) J4.10@1180.12,982.5 ; v1(10050.94,118.11) R24_QLA2.2@10075,118.11
  Signal 2 w8: v1(1180.12,915) 1180.12,717.36 1740,157.48 1917.56,157.48 2123.04,-48 6292,-48 6445,105 6445,135 6467.48,157.48 9357.48,157.48 9400,200 9969.06,200 v1(10050.94,118.11)
ENC-B1#_QLA1: J2_QLA1.18 R23_QLA1.1 | length 85.6
  Top Layer w8: R23_QLA1.1@1725,196.85 J2_QLA1.18@1810.63,196.85
ENC-B1#_QLA2: J2_QLA2.18 R23_QLA2.1 | length 85.6
  Top Layer w8: R23_QLA2.1@10115,196.85 J2_QLA2.18@10200.63,196.85
ENC-B1_QLA1: J4.12 R23_QLA1.2 | length 1025.2
  Top Layer w8: v1(1140.75,915) J4.12@1140.75,982.5 ; v1(1660.94,196.85) R23_QLA1.2@1685,196.85
  Signal 2 w8: v1(1140.75,915) 1140.75,717.05 v1(1660.94,196.85)
ENC-B1_QLA2: J4.8 R23_QLA2.2 | length 9560.2
  Top Layer w8: v1(1219.49,915) J4.8@1219.49,982.5 ; v1(10050.94,196.85) R23_QLA2.2@10075,196.85
  Signal 2 w8: v1(1219.49,915) 1219.49,756.73 1740,236.22 1917.56,236.22 2169.78,-16 6269,-16 6405,120 6405,185 6456.22,236.22 10011.58,236.22 v1(10050.94,196.85)
ENC-B2#_QLA1: J2_QLA1.16 R22_QLA1.1 | length 85.6
  Top Layer w8: R22_QLA1.1@1725,275.59 J2_QLA1.16@1810.63,275.59
ENC-B2#_QLA2: J2_QLA2.16 R22_QLA2.1 | length 85.6
  Top Layer w8: R22_QLA2.1@10115,275.59 J2_QLA2.16@10200.63,275.59
ENC-B2_QLA1: J4.9 R22_QLA1.2 | length 922
  Top Layer w8: v1(1199.8,940) J4.9@1199.8,982.5 ; v1(1660.94,275.59) R22_QLA1.2@1685,275.59
  Signal 2 w8: v1(1199.8,940) 1199.8,736.73 v1(1660.94,275.59)
ENC-B2_QLA2: J4.6 R22_QLA2.2 | length 9512.7
  Top Layer w8: v1(1258.86,915) J4.6@1258.86,982.5 ; v1(10050.94,275.59) R22_QLA2.2@10075,275.59
  Signal 2 w8: v1(1258.86,915) 1258.86,796.1 1740,314.96 1917.56,314.96 2216.52,16 6241,16 6375,150 6375,230 6459.96,314.96 10011.58,314.96 v1(10050.94,275.59)
ENC-B3#_QLA1: J2_QLA1.14 R21_QLA1.1 | length 85.6
  Top Layer w8: R21_QLA1.1@1725,354.33 J2_QLA1.14@1810.63,354.33
ENC-B3#_QLA2: J2_QLA2.14 R21_QLA2.1 | length 85.6
  Top Layer w8: R21_QLA2.1@10115,354.33 J2_QLA2.14@10200.63,354.33
ENC-B3_QLA1: J4.7 R21_QLA1.2 | length 826.9
  Top Layer w8: v1(1239.17,940) J4.7@1239.17,982.5 ; v1(1660.94,354.33) R21_QLA1.2@1685,354.33
  Signal 2 w8: v1(1239.17,940) 1239.17,776.1 v1(1660.94,354.33)
ENC-B3_QLA2: J4.4 R21_QLA2.2 | length 9424.9
  Top Layer w8: v1(1298.23,915) J4.4@1298.23,982.5 ; v1(10050.94,354.33) R21_QLA2.2@10075,354.33
  Signal 2 w8: v1(1298.23,915) 1298.23,835.47 1740,393.7 1917.56,393.7 2263.26,48 6133,48 6340.91,255.91 6360.91,255.91 6375,270 6375,296.26 6472.44,393.7 10011.58,393.7 v1(10050.94,354.33)
ENC-B4#_QLA1: J2_QLA1.12 R20_QLA1.1 | length 85.6
  Top Layer w8: R20_QLA1.1@1725,433.07 J2_QLA1.12@1810.63,433.07
ENC-B4#_QLA2: J2_QLA2.12 R20_QLA2.1 | length 85.6
  Top Layer w8: R20_QLA2.1@10115,433.07 J2_QLA2.12@10200.63,433.07
ENC-B4_QLA1: J4.5 R20_QLA1.2 | length 731.9
  Top Layer w8: v1(1278.54,940) J4.5@1278.54,982.5 ; v1(1660.94,433.07) R20_QLA1.2@1685,433.07
  Signal 2 w8: v1(1278.54,940) 1278.54,815.47 v1(1660.94,433.07)
ENC-B4_QLA2: J4.3 R20_QLA2.2 | length 9426.3
  Top Layer w8: v1(1317.91,940) J4.3@1317.91,982.5 ; v1(10050.94,433.07) R20_QLA2.2@10075,433.07
  Signal 2 w8: v1(1317.91,940) 1317.91,852.09 1697.56,472.44 1917.56,472.44 1950,440 1950,406.51 2276.51,80 6115,80 6455,420 6455,455 6472.44,472.44 10011.58,472.44 v1(10050.94,433.07)
ENC-I1_QLA1: J2_QLA1.10 U11_QLA1.24 | length 843.2
  Top Layer w6: U11_QLA1.24@1274.53,-24 1274.53,121.34 1665,511.81 J2_QLA1.10@1810.63,511.81
ENC-I1_QLA2: J2_QLA2.10 U11_QLA2.24 | length 699.5
  Top Layer w6: U11_QLA2.24@9854.53,41 9854.53,311.34 10055,511.81 J2_QLA2.10@10200.63,511.81
ENC-I2_QLA1: J2_QLA1.8 U11_QLA1.26 | length 938.2
  Top Layer w6: U11_QLA1.26@1235.16,-24 1235.16,160.71 1665,590.55 J2_QLA1.8@1810.63,590.55
ENC-I2_QLA2: J2_QLA2.8 U11_QLA2.26 | length 794.5
  Top Layer w6: U11_QLA2.26@9815.16,41 9815.16,350.71 10055,590.55 J2_QLA2.8@10200.63,590.55
ENC-I3_QLA1: J2_QLA1.6 U11_QLA1.28 | length 1033.3
  Top Layer w6: U11_QLA1.28@1195.79,-24 1195.79,200.08 1665,669.29 J2_QLA1.6@1810.63,669.29
ENC-I3_QLA2: J2_QLA2.6 U11_QLA2.28 | length 889.6
  Top Layer w6: U11_QLA2.28@9775.79,41 9775.79,390.08 10055,669.29 J2_QLA2.6@10200.63,669.29
ENC-I4_QLA1: J2_QLA1.4 U11_QLA1.30 | length 1128.3
  Top Layer w6: U11_QLA1.30@1156.42,-24 1156.42,239.45 1665,748.03 J2_QLA1.4@1810.63,748.03
ENC-I4_QLA2: J2_QLA2.4 U11_QLA2.30 | length 984.6
  Top Layer w6: U11_QLA2.30@9736.42,41 9736.42,429.45 10055,748.03 J2_QLA2.4@10200.63,748.03
EXP-DOUT_QLA1: R30_QLA1.1 U10.3 | length 243.4
  Top Layer w6: U10.3@910.59,-154 910.59,-230.59 945,-265 1030,-265 1037.5,-257.5 R30_QLA1.1@1037.5,-235
EXP-DOUT_QLA2: R30_QLA2.1 U10.1 | length 9407.2
  Top Layer w8: U10.1@859.41,-154 859.41,-179.41 870,-190 v1(885,-190) ; v1(9617.5,-195) R30_QLA2.1@9617.5,-170
  Signal 2 w8: v1(885,-190) 915,-190 965,-140 1010,-140 1059.9,-189.9 1154.9,-189.9 1673.66,-708.66 1917.56,-708.66 2226.22,-400 6185,-400 6336.18,-551.18 9158.82,-551.18 9515,-195 v1(9617.5,-195)
EXP-MISO: J3.13 R6.2 | length 2557.9
  Top Layer w8: v1(-628.94,915) J3.13@-628.94,982.5 ; v1(895,15) R6.2@921,15
  Signal 2 w8: v1(-628.94,915) -628.94,981.06 -575,1035 608.31,1035 638.77,1004.54 638.77,876.23 675,840 675,360 895,140 v1(895,15)
EXP-MOSI_QLA1: J3.15 U8.1 U11_QLA1.33 | length 2917.3
  Top Layer w8: v1(-668.31,915) J3.15@-668.31,982.5 ; U8.1@964.41,-64 964.41,-84.41 970.79,-90.79 U11_QLA1.33@1129,-90.79
  Top Layer w15: U8.1@964.41,-64 v1@964.41,-35.5
  Signal 2 w8: v1(-668.31,915) -668.31,986.69 -590,1065 617.68,1065 653.89,1028.78 653.89,891.11 705,840 705,380 915,170 915,40 962.91,-7.91 v1(962.91,-35.5)
EXP-MOSI_QLA2: R7.2 U11_QLA2.33 | length 9404.6
  Top Layer w8: v1(9635,-5) 9663,-5 9683.79,-25.79 U11_QLA2.33@9709,-25.79
  Top Layer w18: R7.2@954,105 v1(954,127.5)
  Signal 2 w8: v1(954,127.5) 954,106 1355,-295 1375,-295 1631.18,-551.18 1917.56,-551.18 2132.74,-336 6191,-336 6310,-455 6395,-455 6456.3,-393.7 9161.3,-393.7 9550,-5 v1(9635,-5)
EXP-SCLK_QLA1: J3.17 U8.3 U11_QLA1.32 | length 2950.8
  Top Layer w8: v1(-707.68,915) J3.17@-707.68,982.5 ; U8.3@1015,-71.1 U11_QLA1.32@1129,-71.1
  Top Layer w15: U8.3@1015.59,-64 v1@1015.59,-35.5
  Signal 2 w8: v1(-707.68,915) -707.68,982.32 -595,1095 627.05,1095 668.99,1053.06 668.99,906.01 735,840 735,395 935,195 935,70 1017.09,-12.09 v1(1017.09,-35.5)
EXP-SCLK_QLA2: R8.2 U11_QLA2.32 | length 9297.5
  Top Layer w8: v1(9605,15) 9667,15 9688.1,-6.1 U11_QLA2.32@9709,-6.1
  Top Layer w18: R8.2@1026,105 v1(1026,127.5)
  Signal 2 w8: v1(1026,127.5) 1026,109 1607.44,-472.44 1917.56,-472.44 2086,-304 6209,-304 6335,-430 6385,-430 6400,-415 6400,-384.96 6470,-314.96 9190.04,-314.96 9520,15 v1(9605,15)
GND: C1.2 C2.2 C3.2 C4.2 C5.2 C6.2 C7.2 C8.2 C9.2 C10.2 C11.2 C12_QLA1.2 C12_QLA2.2 C13_QLA1.2 C13_QLA2.2 D1_QLA1.1 D1_QLA2.1 D2_QLA1.1 D2_QLA2.1 J1_QLA1.1 J1_QLA1.2 J1_QLA1.14 J1_QLA1.26 J1_QLA1.37 J1_QLA1.38 J1_QLA1.43 J1_QLA1.44 J1_QLA2.1 J1_QLA2.2 J1_QLA2.14 J1_QLA2.26 J1_QLA2.37 J1_QLA2.38 J1_QLA2.43 J1_QLA2.44 J2_QLA1.1 J2_QLA1.2 J2_QLA1.15 J2_QLA1.29 J2_QLA1.43 J2_QLA1.44 J2_QLA2.1 J2_QLA2.2 J2_QLA2.15 J2_QLA2.29 J2_QLA2.43 J2_QLA2.44 J3.1 J3.12 J3.23 J3.34 J3.38 J3.42 J3.46 J3.50 J4.1 J4.11 J4.21 J4.30 J4.40 J4.50 M1.1 M2.1 M3.1 M4.1 M5.1 M6.1 M7.1 M8.1 pad.1@1245,-140 pad.1@8390,0 pad.1@9825,-75 pad.1@-525,-605 pad.1@-525,-745 pad.1@-865,-605 pad.1@-865,-745 pad.2@-695,-675 R34_QLA1.2 R34_QLA2.2 U1.2 U2.2 U3.2 U4.2 U5.2 U6.2 U7.2 U8.2 U9.2 U9.3 U10.2 U11_QLA1.37 U11_QLA1.38 U11_QLA1.39 U11_QLA1.41 U11_QLA2.37 U11_QLA2.38 U11_QLA2.39 U11_QLA2.41 | length 3920.2
  Top Layer w6: v1(-679.5,220) -679.5,240.5 -674.41,245.59 U9.3@-651,245.59
  Top Layer w11: v1(-1357.28,947.5) J3.50@-1357.28,982.5 ; v1(-1278.54,947.5) J3.46@-1278.54,982.5 ; v1(-1199.8,947.5) J3.42@-1199.8,982.5 ; v1(-1121.06,947.5) J3.38@-1121.06,982.5 ; v1(-1042.32,947.5) J3.34@-1042.32,982.5 ; v1(-825.79,947.5) J3.23@-825.79,982.5 ; v1(-609.25,947.5) J3.12@-609.25,982.5 ; v1(-392.72,947.5) J3.1@-392.72,982.5 ; v1(392.72,947.5) J4.50@392.72,982.5 ; v1(589.57,947.5) J4.40@589.57,982.5 ; v1(786.42,947.5) J4.30@786.42,982.5 ; v1(963.58,947.5) J4.21@963.58,982.5 ; v1(1099,-208.9) U11_QLA1.39@1129,-208.9 ; 1099,-189.21 U11_QLA1.38@1129,-189.21 ; v1@1099,-169.53 U11_QLA1.37@1129,-169.53 ; v1(1160.43,947.5) J4.11@1160.43,982.5 ; v1@1357.28,947.5 J4.1@1357.28,982.5 ; v1(9676.08,-104.84) 9676.39,-104.53 U11_QLA2.37@9709,-104.53 ; v1(9679,-143.9) U11_QLA2.39@9709,-143.9 ; 9679,-124.21 U11_QLA2.38@9709,-124.21
  Top Layer w12: R34_QLA1.2@1038.58,-169.84 C13_QLA1.2@1074.58,-169.84 ; R34_QLA2.2@9618.58,-104.84 C13_QLA2.2@9654.58,-104.84
  Top Layer w15: v1(-679.5,220) U9.2@-651,220 ; v1(-679.5,350) U6.2@-651,350 ; v1(-679.5,480) U5.2@-651,480 ; v1(-679.5,590) U3.2@-651,590 ; v1(-679.5,700) U1.2@-651,700 ; U7.2@-604,350 v1(-575.5,350) ; U4.2@-604,590 v1(-575.5,590) ; U2.2@-604,700 v1(-575.5,700) ; U10.2@885,-154 v1(885,-125.5) ; U8.2@990,-64 v1(990,-35.5)
  Top Layer w18: v1(-842.5,350) C6.2@-820,350 ; v1(-842.5,590) C3.2@-820,590 ; v1(-842.5,700) C1.2@-820,700 ; v1(-820,197.5) C9.2@-820,220 ; C5.2@-781,440 v1(-758.5,440) ; v1(-525,474) C11.2@-500,474 ; v1(-525,506) C11.2@-500,506 ; C4.2@-435,590 v1(-412.5,590) ; C2.2@-435,700 v1(-412.5,700) ; C7.2@-434,350 v1(-411.5,350) ; v1(845,-46.5) C10.2@845,-25 ; C12_QLA1.2@969.5,-217.5 v1(969.5,-192.5) ; C8.2@990,105 v1(990,127.5) ; C12_QLA1.2@1001.5,-217.5 v1(1001.5,-192.5) ; C13_QLA1.2@1074.58,-169.84 v1(1096.08,-169.84) ; v1(1099,-208.9) v1@1099,-172.9 ; C12_QLA2.2@9549.5,-152.5 v1(9549.5,-127.5) ; C12_QLA2.2@9581.5,-152.5 v1(9581.5,-127.5) ; C13_QLA2.2@9654.58,-104.84 v1(9676.08,-104.84) ; v1(9679,-143.9) v1@9679,-107.9
  Top Layer w20: v1(-275,-324.54) D1_QLA1.1@-275,-287 ; v1(0,-324.54) D2_QLA1.1@0,-287 ; v1@8115,-332.04 D1_QLA2.1@8115,-294.5 ; v1@8390,-332.04 D2_QLA2.1@8390,-294.5
  Signal 1 w60: M4.1@-1875,-1070 ccw(c-1815,-1070) -1815,-1130 ; M1.1@-1875,1070 cw(c-1815,1070) -1815,1130 ; 1400,1090 1488.39,1001.61 ; 1815,-1130 ccw(c1815,-1070) M2.1@1875,-1070 ; 1815,1130 cw(c1815,1070) M3.1@1875,1070 ; M8.1@6515,-1070 ccw(c6575,-1070) 6575,-1130 ; M5.1@6515,1070 cw(c6575,1070) 6575,1130 ; 10205,-1130 ccw(c10205,-1070) M6.1@10265,-1070 ; 10205,1130 cw(c10205,1070) M7.1@10265,1070
  Signal 2 w12: 10070,-314.96 10240,-314.96 J2_QLA2.29@10279.37,-275.59 10240,-236.22 10070,-236.22 ; 10070,236.22 10240,236.22 J2_QLA2.15@10279.37,275.59 10240,314.96 10070,314.96
  Signal 2 w50: 1702.5,-802.5 1786.36,-802.5 J2_QLA1.44@1810.63,-826.77
  Signal 2 w52: J1_QLA1.37@-1810.63,-590.55 -1660.63,-590.55 ; J1_QLA2.37@6579.37,-590.55 6729.37,-590.55
  other v1: -1680,-1125 -1440,-1125 -1200,-1125 -960,-1125 -720,-1125 -480,-1125 -240,-1125 0,-1125 240,-1125 480,-1125 720,-1125 960,-1125 1200,-1125 1440,-1125 1680,-1125 6710,-1125 6950,-1125 7190,-1125 7430,-1125 7670,-1125 7910,-1125 8150,-1125 8390,-1125 8630,-1125 8870,-1125 9110,-1125 9350,-1125 9590,-1125 9830,-1125 10070,-1125 8115,-335 8390,-335 9920,-295 9535,-230 570,625 1357.5,947.5 -1680,1125 -1400,1125 -1200,1125 -960,1125 -720,1125 -480,1125 -240,1125 0,1125 240,1125 480,1125 720,1125 960,1125 1200,1125 1400,1125 1680,1125 6710,1125 6950,1125 7190,1125 7430,1125 7670,1125 7910,1125 8150,1125 8390,1125 8630,1125 8870,1125 9110,1125 9350,1125 9590,1125 9830,1125 10070,1125
LED1-GRN_QLA1: J2_QLA1.3 U11_QLA1.29 | length 1175.8
  Top Layer w6: U11_QLA1.29@1176.1,-24 1176.1,219.76 1665,708.66 1850,708.66 J2_QLA1.3@1889.37,748.03
LED1-GRN_QLA2: J2_QLA2.3 U11_QLA2.29 | length 1032.1
  Top Layer w6: U11_QLA2.29@9756.1,41 9756.1,409.76 10055,708.66 10240,708.66 J2_QLA2.3@10279.37,748.03
LED1-RED_QLA1: J2_QLA1.5 U11_QLA1.27 | length 1080.8
  Top Layer w6: U11_QLA1.27@1215.47,-24 1215.47,180.39 1665,629.92 1850,629.92 J2_QLA1.5@1889.37,669.29
LED1-RED_QLA2: J2_QLA2.5 U11_QLA2.27 | length 937.1
  Top Layer w6: U11_QLA2.27@9795.47,41 9795.47,370.39 10055,629.92 10240,629.92 J2_QLA2.5@10279.37,669.29
LED2-GRN_QLA1: J2_QLA1.7 U11_QLA1.25 | length 985.8
  Top Layer w6: U11_QLA1.25@1254.84,-24 1254.84,141.02 1665,551.18 1850,551.18 J2_QLA1.7@1889.37,590.55
LED2-GRN_QLA2: J2_QLA2.7 U11_QLA2.25 | length 842.1
  Top Layer w6: U11_QLA2.25@9834.84,41 9834.84,331.02 10055,551.18 10240,551.18 J2_QLA2.7@10279.37,590.55
LED2-RED_QLA1: J2_QLA1.9 U11_QLA1.23 | length 890.7
  Top Layer w6: U11_QLA1.23@1294.21,-24 1294.21,101.65 1665,472.44 1850,472.44 J2_QLA1.9@1889.37,511.81
LED2-RED_QLA2: J2_QLA2.9 U11_QLA2.23 | length 747
  Top Layer w6: U11_QLA2.23@9874.21,41 9874.21,291.65 10055,472.44 10240,472.44 J2_QLA2.9@10279.37,511.81
LIM-H1_QLA1: J2_QLA1.17 U11_QLA1.21 | length 737
  Top Layer w6: U11_QLA1.21@1333.58,-24 1333.58,73.58 1496.22,236.22 1850,236.22 J2_QLA1.17@1889.37,196.85
LIM-H1_QLA2: J2_QLA2.17 U11_QLA2.21 | length 494.5
  Top Layer w6: U11_QLA2.21@9913.58,41 9913.58,94.8 10055,236.22 10240,236.22 J2_QLA2.17@10279.37,196.85
LIM-H2_QLA1: J2_QLA1.19 U11_QLA1.19 | length 639.4
  Top Layer w6: U11_QLA1.19@1361,-71.1 1385,-71.1 1613.58,157.48 1850,157.48 J2_QLA1.19@1889.37,118.11
LIM-H2_QLA2: J2_QLA2.19 U11_QLA2.19 | length 464.9
  Top Layer w6: U11_QLA2.19@9941,-6.1 9963.9,-6.1 9970,0 9970,72.48 10055,157.48 10240,157.48 J2_QLA2.19@10279.37,118.11
LIM-H3_QLA1: J2_QLA1.21 U11_QLA1.18 | length 614.9
  Top Layer w6: U11_QLA1.18@1361,-90.79 1395,-90.79 1564.53,78.74 1850,78.74 J2_QLA1.21@1889.37,39.37
LIM-H3_QLA2: J2_QLA2.21 U11_QLA2.18 | length 411.9
  Top Layer w6: U11_QLA2.18@9941,-25.79 9974.21,-25.79 9990,-10 9990,13.74 10055,78.74 10240,78.74 J2_QLA2.21@10279.37,39.37
LIM-H4_QLA1: J2_QLA1.23 U11_QLA1.17 | length 590.4
  Top Layer w6: U11_QLA1.17@1361,-110.47 1405,-110.47 1515.47,0 1850,0 J2_QLA1.23@1889.37,-39.37
LIM-H4_QLA2: J2_QLA2.23 U11_QLA2.17 | length 373.5
  Top Layer w6: U11_QLA2.17@9941,-45.47 9984.53,-45.47 10030,0 10240,0 J2_QLA2.23@10279.37,-39.37
LIM-N1_QLA1: J2_QLA1.25 U11_QLA1.16 | length 566
  Top Layer w6: U11_QLA1.16@1361,-130.16 1415,-130.16 1466.42,-78.74 1850,-78.74 J2_QLA1.25@1889.37,-118.11
LIM-N1_QLA2: J2_QLA2.25 U11_QLA2.16 | length 360.3
  Top Layer w6: U11_QLA2.16@9941,-65.16 10045.16,-65.16 10058.74,-78.74 10240,-78.74 J2_QLA2.25@10279.37,-118.11
LIM-N2_QLA1: J2_QLA1.28 U11_QLA1.14 | length 460.9
  Top Layer w6: U11_QLA1.14@1361,-169.53 1405,-169.53 1432.32,-196.85 J2_QLA1.28@1810.63,-196.85
LIM-N2_QLA2: J2_QLA2.28 U11_QLA2.14 | length 297.9
  Top Layer w6: U11_QLA2.14@9941,-104.53 9969.53,-104.53 10061.85,-196.85 J2_QLA2.28@10200.63,-196.85
LIM-N3_QLA1: J2_QLA1.27 U11_QLA1.15 | length 547.8
  Top Layer w6: U11_QLA1.15@1361,-149.84 1415,-149.84 1422.64,-157.48 1850,-157.48 J2_QLA1.27@1889.37,-196.85